# Altium PCB led-controller2.PcbDoc
Units mm, origin at the board's own origin, x right, y up, seen from the top; angles counter-clockwise.
Board outline 33.7 x 32.2 mm, 2 copper layers (Top Layer, Bottom Layer), stack 1.569 mm thick; 53 components, 43 nets, 229 pads, 99 vias.
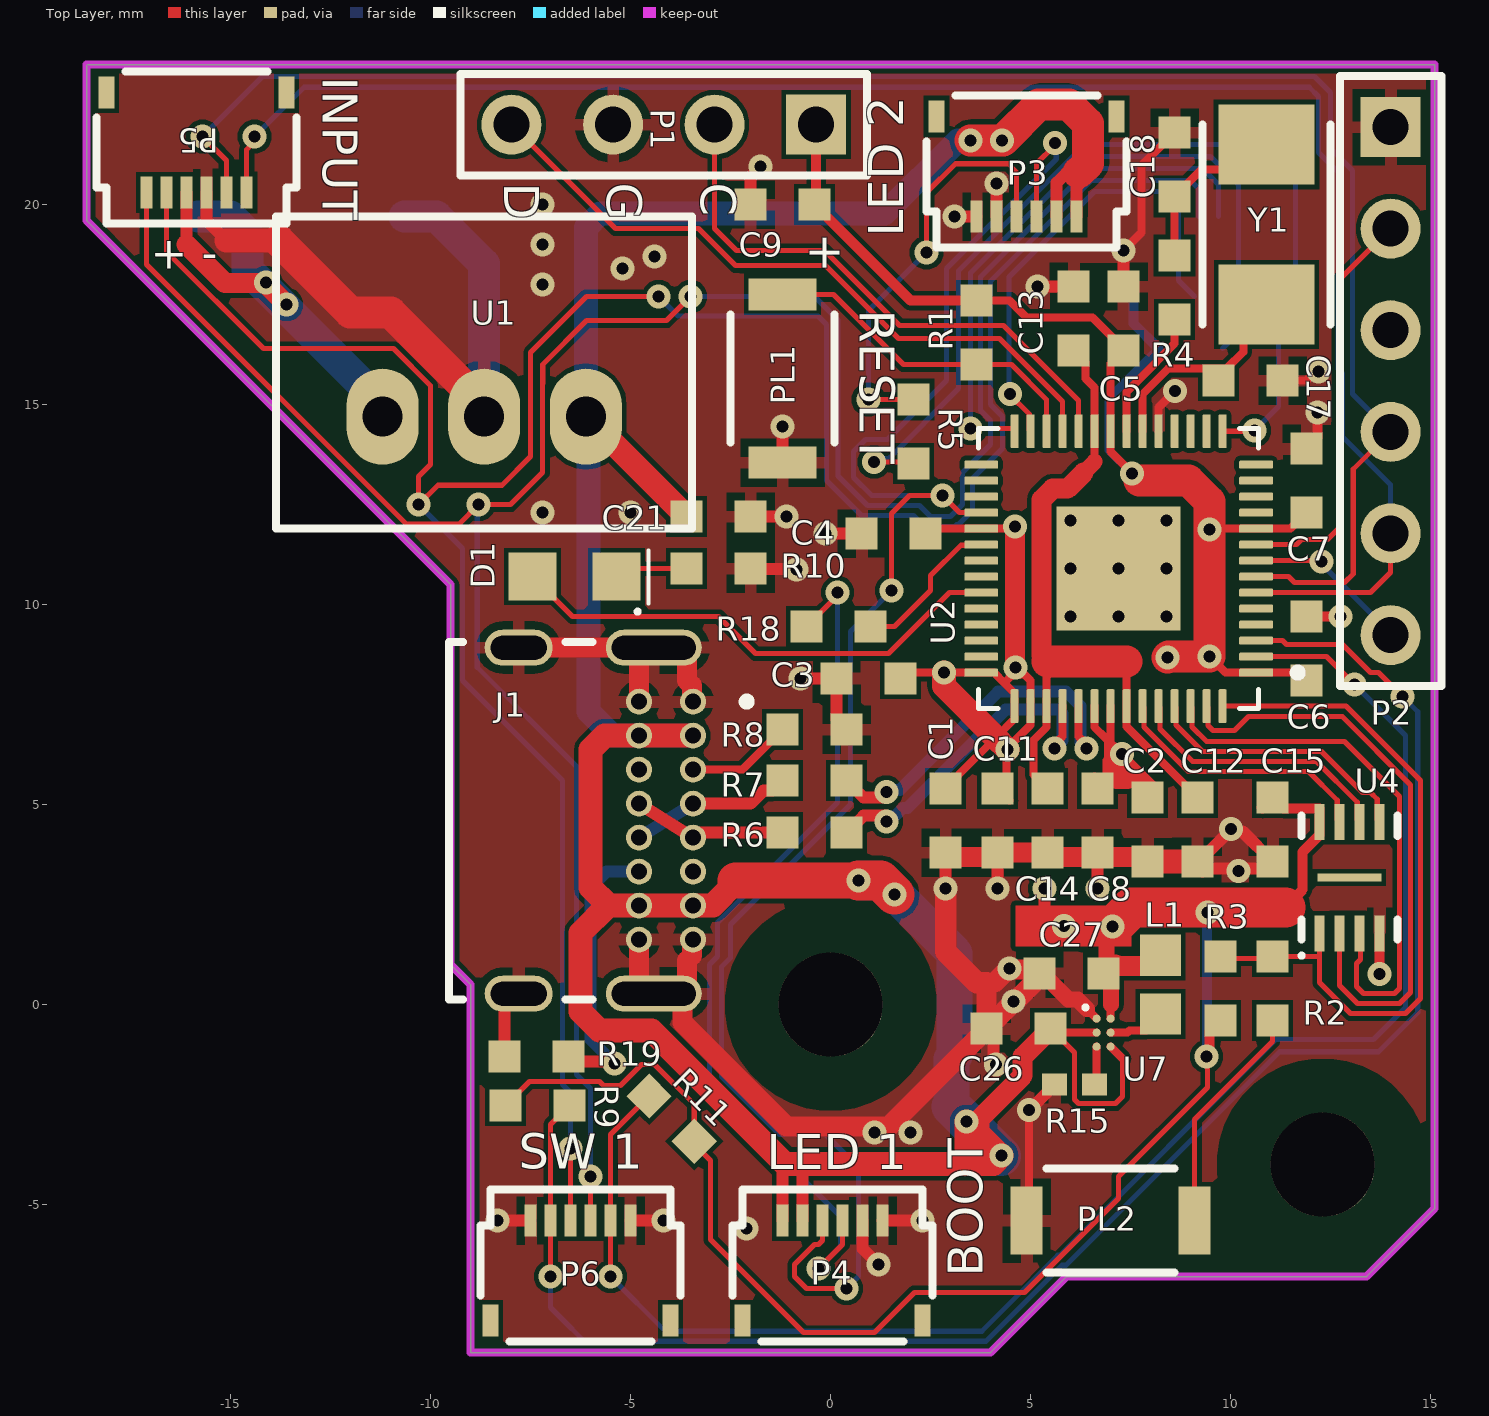
[diagram p0: Top Layer view]
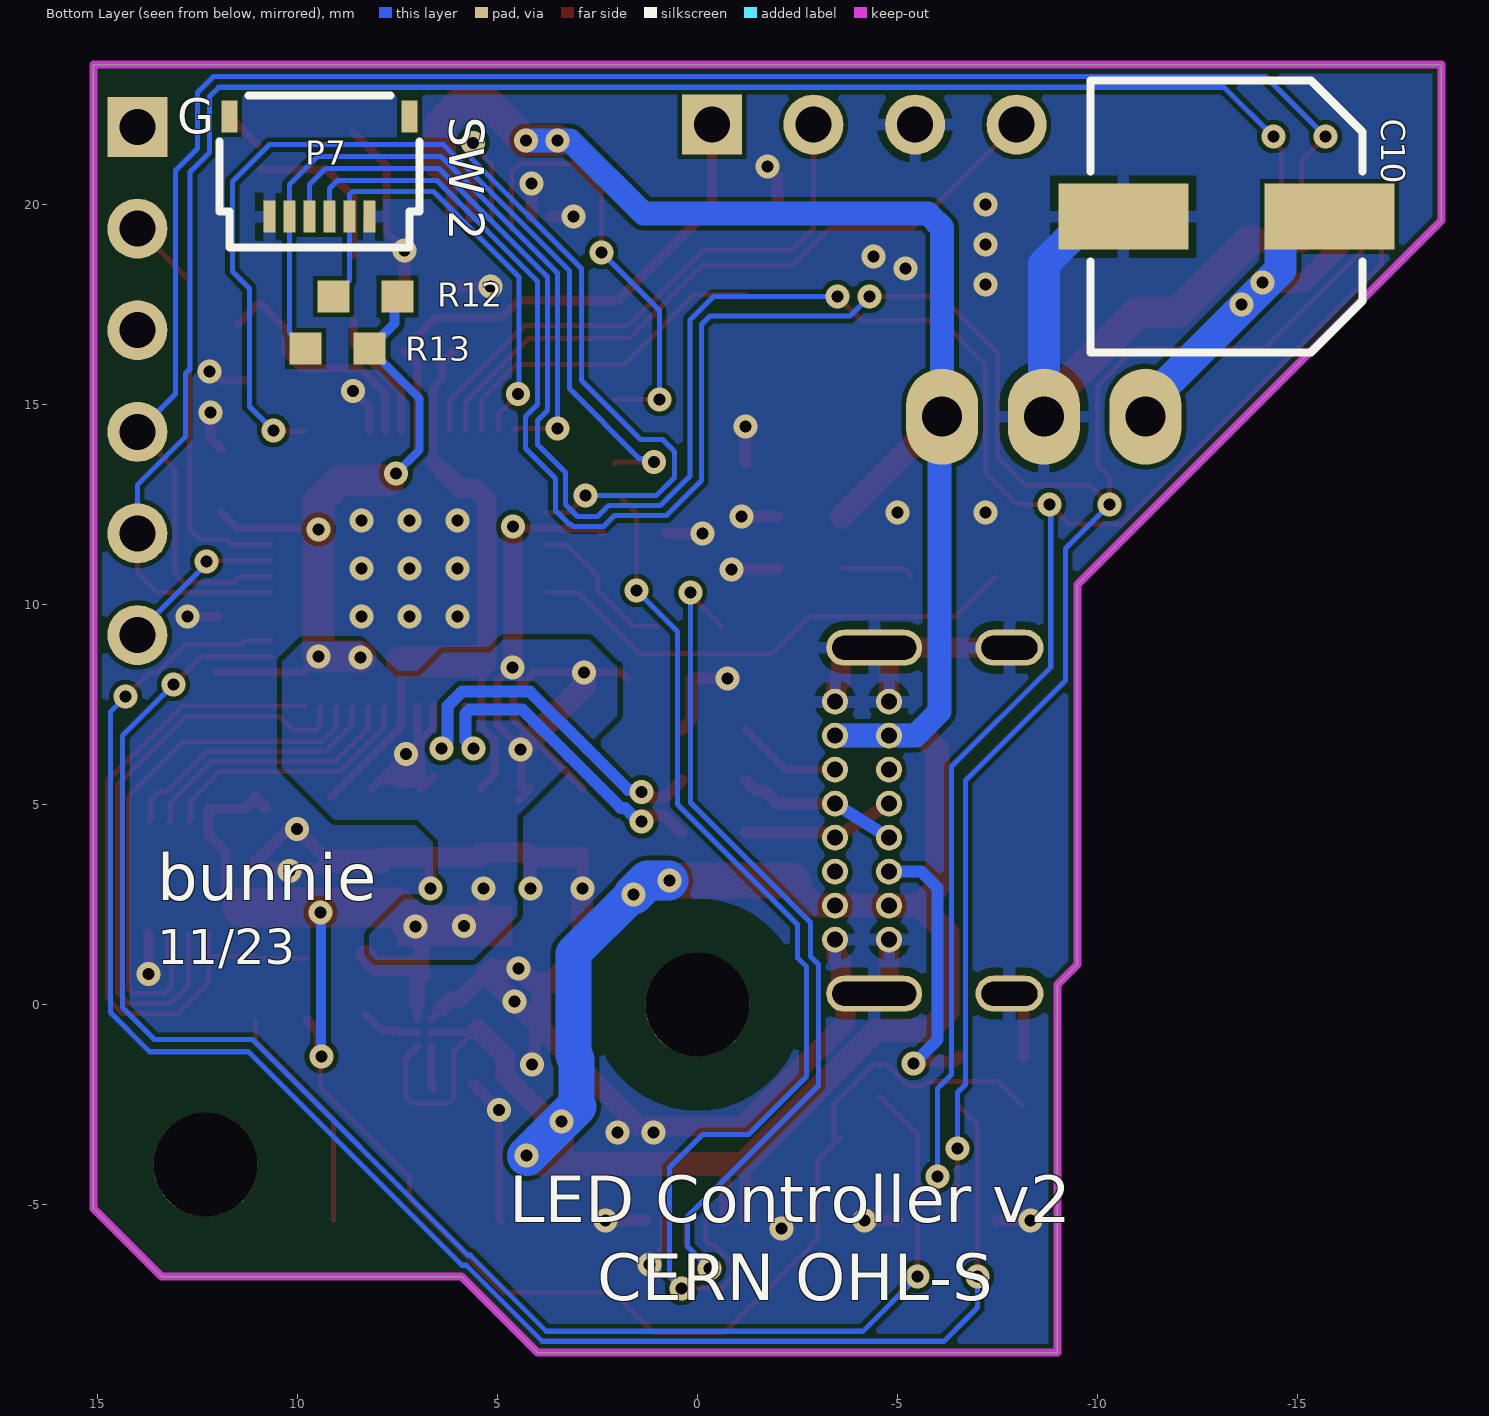
[diagram p1: Bottom Layer view, seen from below]

## Layer stack, top to bottom
Top Solder: solder mask 0.0254, SM-001, Dk 4
Top Layer: signal copper 0.035
Dielectric 1: core 1.4986, Core-043, Dk 4.3
Bottom Layer: signal copper 0.035
Bottom Solder: solder mask 0.0254, SM-001, Dk 4

## Board outline
-9.5,1 -9.5,10.5 -18.6,19.6 -18.6,23.5 15.1,23.5 15.1,-5.1 13.4,-6.8 5.9,-6.8 4,-8.7 -9,-8.7 -9,0.5

## Design rules (kind name [scope] priority, off if disabled: settings)
Clearance [All vs IsPad and not PadIsPlated] p1: gap=1.35 ignorepadtopadclearanceinfootprint=FALSE except(0: Arc-Hole Track-Hole SMDPad-Hole THPad-Hole Via-Hole Fill-Hole Poly-Hole Region-Hole Text-Hole)
Clearance Clearance_1 [All] p2: gap=0.12 ignorepadtopadclearanceinfootprint=FALSE except(0: Arc-Hole Track-Hole SMDPad-Hole THPad-Hole Via-Hole Fill-Hole Poly-Hole Region-Hole Text-Hole)
ComponentClearance [All] p1 off: gap=0.254 collisioncheckmode=3 verticalgap=0.254 showdistances=FALSE
DiffPairsRouting [All] p1: maxlimit=0.3 minlimit=0.15 mostfreqgap=0.15 toplayer_minwidth=0.15 toplayer_maxwidth=0.8 toplayer_prefwidth=0.8 bottomlayer_minwidth=0.15 bottomlayer_maxwidth=0.8 bottomlayer_prefwidth=0.8 maxuncoupledlength=12.7
HoleSize [All] p1: absolutevalues=TRUE maxlimit=2.7 minlimit=0.025 maxpercent=80.000 minpercent=20.000
MinimumSolderMaskSliver [All] p1 off: minsoldermaskwidth=0.254
PolygonConnect [All] p1: thpad.connectstyle=Relief thpad.reliefconductorwidth=0.3 thpad.reliefentries=4 thpad.polygonreliefangle="90 Angle" thpad.airgapwidth=0.2 smdpad.connectstyle=Relief smdpad.reliefconductorwidth=0.3 smdpad.reliefentries=4 smdpad.polygonreliefangle="90 Angle" smdpad.airgapwidth=0.2 via.connectstyle=Direct via.reliefconductorwidth=0.254 via.reliefentries=4 via.polygonreliefangle="90 Angle" via.airgapwidth=0.254
RoutingVias [All] p1: holewidth=0.3 width=0.6 viastyle="Through Hole" minholewidth=0.3 minwidth=0.6 maxholewidth=0.3 maxwidth=0.6
SilkToSilkClearance [All] p1 off: silktosilkclearance=0.254
SilkToSolderMaskClearance [IsPad] p1 off: minsilkscreentomaskgap=0.254 clearancetoexposedcopper=TRUE
SolderMaskExpansion [All] p1: expansion=0.07 istentingtop=FALSE
Width [All] p1: maxlimit=5 minlimit=0.13 preferedwidth=0.15
24 further rules are at their usual default settings.

## Classes and differential pairs
differential pair USB: +USB_P -USB_N
differential pair RPUSB: +RPUSB_P -RPUSB_N

## Components (designator, comment, footprint, x,y, rotation, side; value= is the part's Value field where it differs from the comment)
C1 "0.1uF, 25V, X7R" B_CAP0603 2.875,4.6 r270 top
C2 "0.1uF, 25V, X7R" B_CAP0603 7.925,4.375 r270 top
C3 "0.1uF, 25V, X7R" B_CAP0603 0.95,8.15 r180 top
C4 "0.1uF, 25V, X7R" B_CAP0603 1.575,11.775 r180 top
C5 "0.1uF, 25V, X7R" B_CAP0603 7.325,17.15 r90 top
C6 "0.1uF, 25V, X7R" B_CAP0603 11.9,8.9 r90 top
C7 "2.2uF, 16V, X5R" B_CAP0603 11.9,13.1 r90 top
C8 "2.2uF, 16V, X5R" B_CAP0603 6.675,4.6 r270 top
C9 "0.1uF, 25V, X7R" B_CAP0603 -1.2,20 r180 top
C10 "22uF, 50V" CAPAE7066X61N -13.225,19.7 r0 bottom
C11 "2.2uF, 16V, X5R" B_CAP0603 4.175,4.6 r270 top
C12 "0.1uF, 25V, X7R" B_CAP0603 9.175,4.375 r270 top
C13 "0.1uF, 25V, X7R" B_CAP0603 6.075,17.15 r90 top
C14 "2.2uF, 16V, X5R" B_CAP0603 5.425,4.6 r270 top
C15 "0.1uF, 25V, X7R" B_CAP0603 11.05,4.375 r90 top
C17 "15pF, 50V, NP0" B_CAP0603 10.5,15.6 r180 top
C18 "15pF, 50V, NP0" B_CAP0603 8.6,21 r270 top
C21 "10uF, 6.3V, X5R" B_CAP0603 -2.8,12.2 r0 top
C26 "10uF, 6.3V, X5R" B_CAP0603 4.7,-0.6 r180 top
C27 "10uF, 6.3V, X5R" B_CAP0603 6.025,0.775 r180 top
D1 "white LED" B_LED0805 -6.4,10.7 r180 top
J1 "USB4085-GF-A_REVB" GCT_USB4085-GF-A_REVB -7.8,4.6 r270 top
L1 "0.47uH 0603" B_IND0603 8.25,0.5 r90 top
P1 "Header 4" HDR1X4 -0.36,22 r180 top
P2 "Male 2.54mm 6x1 header" HDR1X6 14,21.94 r270 top
P3 "FH34SRJ-6S-0.5SH(50)" HRS_FH34SRJ-6S-0.5SH(50) 4.9,19.7 r180 top
P4 "FH34SRJ-6S-0.5SH(50)" HRS_FH34SRJ-6S-0.5SH(50) 0.05,-5.4 r0 top
P5 "FH34SRJ-6S-0.5SH(50)" HRS_FH34SRJ-6S-0.5SH(50) -15.85,20.3 r180 top
P6 "FH34SRJ-6S-0.5SH(50)" HRS_FH34SRJ-6S-0.5SH(50) -6.25,-5.4 r0 top
P7 "FH34SRJ-6S-0.5SH(50)" HRS_FH34SRJ-6S-0.5SH(50) 9.45,19.7 r0 bottom
PL1 "Mini Tact" OMRON_B3U-1000P -1.2,15.65 r270 top
PL2 "Mini Tact" OMRON_B3U-1000P 7,-5.4 r180 top
R1 "10k, 1%" B_RES0603 3.65,16.8 r270 top
R2 "1k, 1%" B_RES0603 11.05,0.4 r270 top
R3 "10k, 1%" B_RES0603 9.75,0.4 r270 top
R4 "1k, 1%" B_RES0603 8.6,17.925 r90 top
R5 "27, 1%" B_RES0603 2.075,14.325 r90 top
R6 "27, 1%" B_RES0603 -0.4,4.3 r0 top
R7 "27, 1%" B_RES0603 -0.4,5.6 r0 top
R8 "5.1k, 1%" B_RES0603 -0.4,6.875 r180 top
R9 "10k, 1%" B_RES0603 -7.325,-2.525 r0 top
R10 "51, 1%" B_RES0603 -2.8,10.9 r180 top
R11 "10k, 1%" B_RES0603 -3.975,-2.85 r135 top
R12 "10k, 1%" B_RES0603 8.3,17.7 r0 bottom
R13 "10k, 1%" B_RES0603 9,16.4 r0 bottom
R15 "249k, 1%, +/-200ppm" B_RES0402 6.1,-2 r180 top
R18 "27, 1%" B_RES0603 0.2,9.45 r180 top
R19 "5.1k, 1%" B_RES0603 -7.35,-1.3 r0 top
U1 "OKI-78SR-5/1.5-W36-C" MURATA_OKI-78SR -8.66,14.7 r0 top
U2 "RP2040" QFN40P700X700X90-57N 7.2,10.9 r180 top
U4 "W25Q16JVUXIQ" USON-8 12.975,3.175 r90 top
U7 "TPS62802" BGA6C35P2X3_70X105X40_NSMD 6.825,-0.7 r0 top
Y1 "12.0000 MHz 12pF" NDK_NX5032A 10.9,17.5 r90 top

## Footprints (in the part's own frame and the unit in brackets; to place one, negate y for a bottom-side part, rotate by r counter-clockwise, add the part's x,y. Pads: shape width x height; smd on the part's side, far side on the other; paste and mask are expansions set on the pad)
B_CAP0603 [mm] "Capacitor 0603"
  rect 0.8x0.8 smd mask+0.07: 1(-0.8,0) 2(0.8,0)
  body extent -0.85,-0.45 0.85,0.45, height 0.9
B_IND0603 [mm] "Inductor 0603"
  rect 1.03x1.02 smd: 1(-0.735,0) 2(0.735,0)
  body extent -0.9,-0.5 0.9,0.5, height 0.8
B_LED0805 [mm] "Molded Diode, 2-Leads, Body 2.00x1.25mm, IPC Medium Density"
  rect 1.2x1.2 smd mask+0.07: 1(1.05,0) 2(-1.05,0)
  silkscreen extent -1.85,-0.65 -1.53,0.92, body extent -1,-0.62 1,0.63, height 0.8
B_RES0402 [mm] "Resistor 0402"
  rect 0.63x0.55 smd mask+0.07: 1(-0.5,0) 2(0.5,0)
  body extent -0.53,-0.27 0.53,0.28, height 0.4
B_RES0603 [mm] "Resistor 0603"
  rect 0.8x0.8 smd mask+0.07: 1(-0.8,0) 2(0.8,0)
  body extent -0.85,-0.45 0.85,0.45, height 0.9
BGA6C35P2X3_70X105X40_NSMD [mm] "BGA, 6-Leads, Body 0.70x1.05mmx0.40mm, Pitch 0.35mm"
  round 0.2 smd mask+0.032: A1(-0.175,0.35) A2(0.175,0.35) B1(-0.175,0) B2(0.175,0) C1(-0.175,-0.35) C2(0.175,-0.35)
  silkscreen extent -0.5,0.58 -0.41,0.68, body extent -0.35,-0.53 0.35,0.53, height 0.4
CAPAE7066X61N [mm] "Aluminum Electrolytic Capacitor, Body 6.3mm dia, 5.8mm height, IPC Medium Density"
  rect 3.25x1.65 smd: 1(-2.575,0) 2(2.575,0)
  silkscreen extent -3.4,-3.4 3.4,3.4, body extent -3.4,-3.4 3.4,3.4, height 6.1
GCT_USB4085-GF-A_REVB [mm]
  round 0.65 hole 0.4: A1(-2.975,4.36) A4(-2.125,4.36) A5(-1.275,4.36) A6(-0.425,4.36) A7(0.425,4.36) A8(1.275,4.36) A9(2.125,4.36) A12(2.975,4.36) B1(2.975,3.01) B4(2.125,3.01) B5(1.275,3.01) B6(0.425,3.01) B7(-0.425,3.01) B8(-1.275,3.01) B9(-2.125,3.01) B12(-2.975,3.01)
  oval 0.9x1.7 hole 0.6 slot 1.4 at 90 deg: S1(-4.325,0) S2(4.325,0)
  oval 0.9x2.4 hole 0.6 slot 2.1 at 90 deg: S3(-4.325,3.38) S4(4.325,3.38)
  silkscreen extent -4.47,-1.74 4.47,5.8, body extent -4.47,-4.25 4.47,4.92, height 3.46
HDR1X4 [mm]
  rect 1.5x1.5 hole 0.9: 1(0,0)
  round 1.5 hole 0.9: 2(2.54,0) 3(5.08,0) 4(7.62,0)
  silkscreen extent -1.27,-1.27 8.89,1.27
HDR1X6 [mm]
  rect 1.5x1.5 hole 0.9: 1(0,0)
  round 1.5 hole 0.9: 2(2.54,0) 3(5.08,0) 4(7.62,0) 5(10.16,0) 6(12.7,0)
  silkscreen extent -1.27,-1.27 13.97,1.27
HRS_FH34SRJ-6S-0.5SH(50) [mm] "Top/bottom entry, back-lock 0.3mm thick FPC, 6 pins"
  rect 0.4x0.8 smd mask+0.07: 0(-2.25,-2.5) 0(2.25,-2.5)
  rect 0.3x0.8 smd mask+0.07: 1(1.25,0) 2(0.75,0) 3(0.25,0) 4(-0.25,0) 5(-0.75,0) 6(-1.25,0)
  silkscreen extent -2.5,-3.03 2.5,0.77, body extent -2.5,-3.02 2.5,0.78, height 1
MURATA_OKI-78SR [mm] "OKI-78SR LDO replacement"
  oval 1.8x2.4 hole 1 mask+0.07: 1(-2.54,0) 2(0,0) 3(2.54,0)
  silkscreen extent -5.2,-2.8 5.2,5, body extent -5.21,-2.8 5.21,4.93, height 16.58
NDK_NX5032A [mm] "5x3.2mm crystal, SMT"
  rect 2x2.4 smd: 1(0,0) 2(4,0)
  silkscreen extent -0.5,-1.6 4.5,1.6
OMRON_B3U-1000P [mm] "Ultra-Small Tactile Switch (SMT)"
  rect 0.8x1.7 smd mask+0.07: 1(-2.1,0) 2(2.1,0)
  silkscreen extent -1.6,-1.3 1.6,1.3, body extent -2,-1.25 2,1.25, height 1.75
QFN40P700X700X90-57N [mm]
  rrect25% 0.84x0.2 smd: 1(-3.435,2.6) 2(-3.435,2.2) 3(-3.435,1.8) 4(-3.435,1.4) 5(-3.435,1) 6(-3.435,0.6) 7(-3.435,0.2) 8(-3.435,-0.2) 9(-3.435,-0.6) 10(-3.435,-1) 11(-3.435,-1.4) 12(-3.435,-1.8) 13(-3.435,-2.2) 14(-3.435,-2.6) 29(3.435,-2.6) 30(3.435,-2.2) 31(3.435,-1.8) 32(3.435,-1.4) 33(3.435,-1) 34(3.435,-0.6) 35(3.435,-0.2) 36(3.435,0.2) 37(3.435,0.6) 38(3.435,1) 39(3.435,1.4) 40(3.435,1.8) 41(3.435,2.2) 42(3.435,2.6)
  rrect25% 0.2x0.84 smd: 15(-2.6,-3.435) 16(-2.2,-3.435) 17(-1.8,-3.435) 18(-1.4,-3.435) 19(-1,-3.435) 20(-0.6,-3.435) 21(-0.2,-3.435) 22(0.2,-3.435) 23(0.6,-3.435) 24(1,-3.435) 25(1.4,-3.435) 26(1.8,-3.435) 27(2.2,-3.435) 28(2.6,-3.435) 43(2.6,3.435) 44(2.2,3.435) 45(1.8,3.435) 46(1.4,3.435) 47(1,3.435) 48(0.6,3.435) 49(0.2,3.435) 50(-0.2,3.435) 51(-0.6,3.435) 52(-1,3.435) 53(-1.4,3.435) 54(-1.8,3.435) 55(-2.2,3.435) 56(-2.6,3.435)
  rect 3.1x3.1 smd paste-0.57: 57(0,0)
  silkscreen extent -4.57,-3.5 3.5,3.5, body extent -3.5,-3.5 3.5,3.5, height 0.9
USON-8 [mm] "SON, 8-Leads, Body 2.00x3.00mm, Pitch 0.50mm, Thermal Pad 1.60x0.20mm, IPC Medium Density"
  rect 0.9x0.25 smd mask+0.07: 1(-1.395,0.75) 2(-1.395,0.25) 3(-1.395,-0.25) 4(-1.395,-0.75) 5(1.395,-0.75) 6(1.395,-0.25) 7(1.395,0.25) 8(1.395,0.75)
  rect 0.2x1.6 smd mask+0.07: 9(0,0)
  silkscreen extent -2,-1.2 1.55,1.25, body extent -1.55,-1.05 1.55,1.05, height 0.6

## Part data
C1 C2 C3 C4 C5 C6 C9 C12 C13 C15: library part "Cap Semi", "Capacitor (Semiconductor SIM Model)", MPN=CC0603KRX7R8BB104, MYPN=C-104-25-X7R-0603, VENDOR=Murata
C7 C8 C11 C14: library part "Cap Semi", "Capacitor (Semiconductor SIM Model)", MPN=CL10A225KO8NNNC, MYPN=C-225-16-X5R-0603, VENDOR=Samsung
C10: library part "Cap Pol1", "Polarized Capacitor (Radial)", MPN=EEH-ZA1H220P, MYPN=C-226-50-UCL-6.3x8.0, VENDOR=Panasonic
C17 C18: library part "Cap Semi", "Capacitor (Semiconductor SIM Model)", MPN=CL10C150JB81PNC, MYPN=C-150-50-NP0-0603, VENDOR=Samsung
C21 C26 C27: library part "Cap Semi", "Capacitor (Semiconductor SIM Model)", MPN=CL10A106MQ8NNNC, MYPN=C-106-6.3-X5R-0603, VENDOR=Samsung
D1: library part LED2, "Typical RED, GREEN, YELLOW, AMBER GaAs LED", MPN=EAST2012WA1, MYPN=D-LED-WHITE1-0805, VENDOR=Everlight
J1: "USB-C (USB TYPE-C) USB 2.0 Receptacle Connector 24 (16+8 Dummy) Position Through Hole, Right Angle, low cost, 3.46mm profile, 16 pin, horizontal, Top mount", MPN=USB4085-GF-A, Package=None, Availability="In Stock", Check_prices=https://www.snapeda.com/parts/USB4085-GF-A/Global+Connector+Technology/view-part/?ref=eda, MF="Global Connector Technology", MP=USB4085-GF-A, Price=None, SnapEDA_Link=https://www.snapeda.com/parts/USB4085-GF-A/Global+Connector+Technology/view-part/?ref=snap, VENDOR=GCT
L1: library part "Inductor Iron", "Magnetic-Core Inductor", MPN=TFM160808ALC-R47MTAA, MYPN=L-TFM160808ALC-R47MTAA, VENDOR=TDK
P1: "Header, 4-Pin", MPN="PH1-04-UA / ANY", LatestRevisionDate=17-Jul-2002, LatestRevisionNote="Re-released for DXP Platform.", Publisher="Altium Limited", VENDOR="Adam Tech / ANY"
P2: library part "Header 6", "Header, 6-Pin", MPN="PH1-06-UA / ANY", LatestRevisionDate=17-Jul-2002, LatestRevisionNote="Re-released for DXP Platform.", Publisher="Altium Limited", VENDOR="Adam Tech / ANY"
P3 P4 P5 P6 P7: library part "Header 6", "Header, 6-Pin", LatestRevisionDate=17-Jul-2002, LatestRevisionNote="Re-released for DXP Platform.", MPN=FH34SRJ-6S-0.5SH(50), MYPN=J-FH34SRJ-6S-0.5SH(50), Publisher="Altium Limited", VENDOR=HRS
PL1 PL2: library part "Header 2", "Header, 2-Pin", MPN=B3U-1000P, LatestRevisionDate=17-Jul-2002, LatestRevisionNote="Re-released for DXP Platform.", MYPN=SW-EVQ-P6DB35, Publisher="Altium Limited", VENDOR=Omron
R1 R3 R9 R11 R12 R13: library part Res1, "Resistor", MPN=RC0603FR-0710KL, MYPN=R-103-1P-1_16W-0603, VENDOR=Yageo
R2 R4 R5 R6 R7 R10 R18: library part Res1, "Resistor", MPN=ANY, VENDOR=ANY
  R2 R4: MYPN=R-102-1P-1_16W-0603
  R5 R6 R7 R18: MYPN=R-270-1P-1_16W-0603
  R10: MYPN=R-510-1P-1_16W-0603
R8 R19: library part Res1, "Resistor", MPN=RC0603FR-075K1L, MYPN=R-512-1P-1_16W-0603, VENDOR=Yageo
R15: library part Res1, "Resistor", MPN=RC0402FR-07249KL, MYPN=R-2493-1P-1_16W-0402, VENDOR=Yageo
U1: library part VR20, "OKI-78SR switching regulator", MFG=Murata, MPN=OKI-78SR-5/1.5-W36-C
U2: "RP2040 chip for Raspberry Pi Pico - ARMÂ® CortexÂ®-M0+ MCU 32-Bit", MPN=SC0914(7/13), Package=None, Availability="In Stock", Check_prices=https://www.snapeda.com/parts/RP2040/Raspberry+Pi/view-part/?ref=eda, MF="Raspberry Pi", MP=RP2040, Price=None, Purchase-URL=https://pricing.snapeda.com/search/part/RP2040/?ref=eda, SnapEDA_Link=https://www.snapeda.com/parts/RP2040/Raspberry+Pi/view-part/?ref=snap, VENDOR="Raspberry Pi"
U4: library part EN25P05-50GCP, "16Mbit SPI NOR FLASH", MPN=W25Q16JVUXIQ, MYPN="UW25Q16JVUXIQ TR", VENDOR=Winbond
U7: "Buck regulator, 4MHz, 0.6A, 1.8V-3.3V, low Iq", MPN=TPS62802YKAR, MYPN=U-TPS62802YKA(T/R), VENDOR=TI
Y1: library part XTAL, "Crystal Oscillator", MPN=ECS-120-12-30-JGN-TR, LatestRevisionDate=17-Jul-2002, LatestRevisionNote="Re-released for DXP Platform.", PackageReference=R38, Published=8-Jun-2000, Publisher="Altium Limited", VENDOR=ECS

## Free pads (board coordinates)
  round 2.6 hole 2.6 unplated mask+1.2: 0(0,0) 0(12.3,-4)

## Via types
v1: diameter 0.6, hole 0.3, Top Layer to Bottom Layer, tented both sides, 90 vias
v2: diameter 0.6, hole 0.3, Top Layer to Bottom Layer, tented top, 9 vias

## Nets (pads, with @x,y where several pads share a name; then routed paths per layer and width w, separated by ;. In a path a pad name is that pad's centre, name@x,y a point inside that pad or via, vN(x,y) a via of type N, cw(c..) or ccw(c..) an arc to the next point about the centre after c; other vN are vias at no path point)
1050_OFF: P3.4 P4.4 U2.32 | length 44.4
  Top Layer w0.13: P4.4 -0.2,-5.9 -0.3,-6 -0.4,-6 -0.9,-6.5 -0.9,-6.8 -0.6,-7.1 v1(0.4,-7.1) ; v1@1.55,10.325 v1(1.525,10.35) 1.525,12.275 1.975,12.725 v1(2.8,12.725) 3.225,12.3 U2.32 ; P3.4 5.15,21.025 5.611,21.486 v1(5.611,21.547)
  Bottom Layer w0.13: v1(0.4,-7.1) 0.7,-6.8 0.7,-4.075 -0.125,-3.25 -1.275,-3.25 -2.725,-1.8 -2.725,0.946 -2.5,1.171 -2.5,2 0.5,5 0.5,9.325 v1(1.525,10.35) ; v1(2.8,12.725) 1.029,12.725 0.575,13.179 0.575,13.825 0.875,14.125 1.425,14.125 2.9,15.6 2.9,18.4 5.642,21.142 5.642,21.515 v1(5.611,21.547)
D_PWM: R18.1 U2.34 | length 3.8
  Top Layer w0.13: R18.1 1.6,9.45 2.5,10.35 2.5,10.725 3.259,11.484 3.749,11.484 U2.34
D_PWM2: R5.1 U2.15 | length 24.4
  Top Layer w0.13: v1(1.087,13.563) 2.037,13.563 R5.1 ; U2.15 10.585,14.335 v1(10.6,14.35)
  Bottom Layer w0.13: v1(1.087,13.563) 1.17,13.645 1.445,13.645 3.2,15.4 3.2,18.346 6.354,21.5 10.7,21.5 11.625,20.575 11.625,18.325 11.2,17.9 11.2,14.95 v1(10.6,14.35)
ESTOP1: P5.1 P6.3 P7.3 | length 66.7
  Top Layer w0.13: P5.1 -17.1,18.503 -10.612,12.015 -9.285,12.015 v1(-8.8,12.5) -8,12.5 -7.2,13.3 -7.2,14.296 cw(c-6.12,14.4) -7.205,14.4 -7.205,15 cw(c-6.12,15) -7.205,15.009 -7.197,16.003 -6.1,17.1 -4.1,17.1 v1(-3.5,17.7) ; P6.3 v1(-6,-4.3)
  Bottom Layer w0.13: v1(-8.8,12.5) -8.835,12.465 -8.835,8.435 -6.35,5.95 -6.35,-1.75 -6,-2.1 v1(-6,-4.3) ; v1(-3.5,17.7) -0.4,17.7 0.183,17.117 0.183,13.217 0.925,12.475 2.225,12.475 2.5,12.2 3,12.2 3.3,12.5 3.3,13.3 4,14 4,14.6 3.75,14.85 3.75,18.189 6.461,20.9 9.3,20.9 9.7,20.5 P7.3
ESTOP2: P5.2 P6.4 P7.4 | length 67.6
  Top Layer w0.13: P5.2 -16.6,18.82 -14.18,16.4 -10.927,16.4 -10,15.473 -10,13.5 -10.3,13.2 v1(-10.3,12.5) -9.815,12.985 -8.215,12.985 -7.5,13.7 -7.5,16.3 -6.1,17.7 v1(-4.3,17.7) ; P6.4 v1(-6.5,-3.6)
  Bottom Layer w0.13: v1(-10.3,12.5) -9.2,11.4 -9.2,8.1 -6.7,5.6 -6.7,-2 -6.5,-2.2 v1(-6.5,-3.6) ; v1(-4.3,17.7) -3.815,17.215 -0.315,17.215 -0.1,17 -0.1,13.1 0.775,12.225 2.075,12.225 2.3,12 2.35,11.95 3.104,11.95 3.154,12 3.2,12 3.55,12.35 3.55,13.15 4.3,13.9 4.3,14.7 4,15 4,18.086 6.514,20.6 9,20.6 9.2,20.4 P7.4
GND: C1.2 C2.2 C3.2 C4.2 C5.2 C6.2 C7.2 C8.2 C9.2 C10.2 C11.2 C12.2 C13.2 C14.2 C15.1 C17.1 C18.1 C21.2 C26.2 C27.2 J1.A1 J1.A12 J1.B1 J1.B12 J1.S1 J1.S2 J1.S3 J1.S4 P1.3 P2.1 P3.1 P3.2 P4.1 P4.2 P5.4 P6.1 P6.6 P7.1 P7.6 PL1.2 PL2.2 R8.1 R10.1 R15.2 R19.1 U1.2 U2.19 U2.57 U4.4 U7.A1 | length 88.6
  Top Layer w0.2: PL2.2 4.964,-5.336 v1(4.964,-2.636) ; 6.412,-0.113 U7.A1 ; v1(7.325,18.85) 7.775,19.3 7.775,20.975 C18.1 ; U2.19 8.2,14.926 v1(8.612,15.338) ; C17.1 11.898,15.6 12.123,15.825 v1(12.2,15.825)
  Top Layer w0.25: C7.2 12.175,14.175 v1(12.175,14.8) ; C6.2@12,9.7 v1(12.75,9.7) ; v1(13.725,0.76) U4.4
  Top Layer w0.3: P5.4 -15.6,19.6 -15.1,19.1 ; v1(-8.325,-5.4) P6.6 ; R19.1 -8.15,-0.002 -7.873,0.275 J1.S2 ; P6.1 v1(-4.175,-5.4) ; R10.1 -1.987,10.888 -0.862,10.888 v1(-0.85,10.875) v1@-0.825,10.9 ; C21.2 v1(-1.1,12.2) ; C9.2 -2,20.7 v1(-1.75,20.95) ; PL1.2 v1(-1.2,14.45) ; v1(-0.75,8.15) C3.2 0.15,7.125 R8.1 ; v1(-0.125,11.775) C4.2 ; P4.2 0.8,-6.1 v1(1.2,-6.5) ; P4.1 v1(2.3,-5.4) ; v1(2.875,2.9) C1.2 C1.2@2.988,3.688 ; v1(3.1,19.7) P3.1 ; C26.2 4.073,-0.773 4.073,-1.44 v1(4.13,-1.497) ; v1@4.1,20.5 4.15,20.45 P3.2 ; v1(4.175,2.9) C11.2@4.175,3.688 ; v1(4.575,0.075) v1@4.6,0.075 ; v1(4.964,-2.636) R15.2 ; C27.2@5.153,0.922 C27.2@5.3,0.775 ; v1(5.175,17.95) C13.2 ; v1(6.675,2.9) C8.2@6.675,3.688 ; C5.2 v1(7.325,18.85) ; C12.2@9.3,3.325 9.377,3.402 10.143,3.402 v1(10.2,3.345) 10.257,3.402 10.877,3.402 C15.1 10.296,4.329 10.069,4.329 v1(10.011,4.386) C12.2@9.375,3.75
  Top Layer w0.4: C27.2@5.3,0.775 5.95,0.125 6.175,0.125 6.412,-0.113
  Top Layer w0.5: J1.S1 J1.S3 -3.778,8.925 -3.593,8.74 -3.593,8.098 -3.469,7.974 -3.469,7.604 J1.A1 ; J1.B1 -4.79,0.275 J1.S4 -3.778,0.275 -3.593,0.46 -3.593,1.102 -3.469,1.226 -3.469,1.596 J1.A12 ; J1.B12 J1.S3@-4.79,8.74 ; J1.S4@-3.724,0.09 -3.699,0.09 -3.699,-0.451 -1.1,-3.05 1.45,-3.05 C26.2 ; C1.2@2.988,3.688 4.175,3.688 4.288,3.8 C14.2 ; v1(4.575,0.075) C26.2 ; v1@4.6,0.075 C27.2@5.3,0.775 ; C27.2@5.153,0.922 5.111,0.881 4.494,0.881 v1(4.475,0.9) 4.448,0.9 4.098,0.55 3.9,0.55 C26.2 ; C14.2@5.425,3.688 6.675,3.688 C2.2@7.925,3.688
  Top Layer w0.54: v1(2.875,2.9) 2.875,1.325 3.65,0.55 3.9,0.55
  Top Layer w0.6: -15.1,19.1 -13.8,19.1 ; C2.2 C12.2
  Top Layer w0.8: -13.8,19.1 -12,17.3 -11,17.3 -8.66,14.96 U1.2
  Bottom Layer w0.8: C10.2 -9.85,19.7 -8.66,18.51 U1.2
  other v1: -2.1,-5.6 1.1,-3.2 2,-3.2 -7.2,12.3 -5,12.3 -7.2,18 -5.2,18.4 -4.4,18.7 -7.2,19 -7.2,20 4.15,20.532
  other v2: 6,9.7 7.2,9.7 8.4,9.7 6,10.9 7.2,10.9 8.4,10.9 6,12.1 7.2,12.1 8.4,12.1
LIMIT_A0: P6.2 R11.2 U2.2 | length 40.1
  Top Layer w0.13: v1(-5.5,-6.8) P6.2 -5.5,-3.244 R11.2 ; U2.2 12.4,8.7 v1(13.1,8)
  Bottom Layer w0.13: v1(-5.5,-6.8) -4.135,-8.165 3.778,-8.165 5.678,-6.265 5.735,-6.265 11.125,-0.875 13.575,-0.875 14.375,-0.075 14.375,6.725 v1(13.1,8)
LIMIT_A1: P6.5 R9.2 U2.3 | length 43
  Top Layer w0.13: v1(-7,-6.8) P6.5 -7,-3 R9.2 ; U2.3 11.3,9.1 11.4,9 12.8,9 13.5,8.3 13.7,8.3 v1(14.3,7.7)
  Bottom Layer w0.13: v1(-7,-6.8) -7,-7.575 -6.737,-7.838 -6.16,-8.415 3.882,-8.415 5.782,-6.515 5.885,-6.515 11.224,-1.176 13.699,-1.176 14.676,-0.199 14.676,7.324 v1(14.3,7.7)
LIMIT_B0: P7.2 R13.2 U2.28 | length 17.5
  Top Layer w0.13: v1(3.5,14.4) 4.565,14.4 4.6,14.365 U2.28
  Bottom Layer w0.13: v1(3.5,14.4) 3.5,18.293 6.407,21.2 9.5,21.2 10.2,20.5 P7.2 10.2,16.8 R13.2
LIMIT_B1: P7.5 R12.2 U2.27 | length 12
  Top Layer w0.13: v1(4.485,15.27) 4.485,15.244 4.965,14.764 4.965,14.37 U2.27
  Bottom Layer w0.13: v1(4.485,15.27) 4.459,15.296 4.459,18.191 6.596,20.328 8.622,20.328 8.7,20.25 P7.5 8.7,18.1 R12.2
NetC17_2: C17.2 U2.20 Y1.1 | length 6
  Top Layer w0.2: U2.20 7.8,15.261 8.439,15.9 9.9,15.9 10.317,16.317 10.317,16.917 Y1.1 ; Y1.1@11,17.5 Y1.1@11.5,17
NetC18_2: C18.2 R4.2 Y1.2 | length 4.9
  Top Layer w0.2: R4.2 C18.2 9.275,20.875 Y1.2@10.925,20.875 ; Y1.2@11,21.5 Y1.2@11.575,22.075
NetD1_1: D1.1 U2.37 | length 12.6
  Top Layer w0.13: D1.1 -6.45,9.7 -2.8,9.7 -1.875,8.775 1.45,8.775 2.975,10.3 U2.37
NetD1_2: D1.2 R10.2 | length 1.8
  Top Layer w0.13: D1.2 -5.15,10.9 R10.2
NetJ1_A5: J1.A5 R8.2 | length 2.7
  Top Layer w0.2: J1.A5 -2.2,5.875 R8.2
NetJ1_B5: J1.B5 R19.2 | length 7.3
  Top Layer w0.3: R19.2 -6.432,-1.418 -5.457,-1.418 v1(-5.4,-1.475) v1@-5.457,-1.532
  Bottom Layer w0.3: v1(-5.4,-1.475) -6,-0.875 -6,2.925 -5.6,3.325 J1.B5
NetPL2_1: PL2.1 R2.2 | length 5.8
  Top Layer w0.13: PL2.1 9.1,-2.875 11.05,-0.925 R2.2
NetR4_1: R4.1 U2.21 | length 3.3
  Top Layer w0.2: U2.21 7.4,15.314 8.15,16.064 8.15,16.075 8.6,16.525 R4.1
NetR15_1: R15.1 U7.C1 | length 1.1
  Top Layer w0.2: R15.1@6.6,-2.1 6.65,-2.05 U7.C1
P1.1V: C12.1 C13.1 C14.1 U2.23 U2.45 U2.50 | length 18.5
  Top Layer w0.2: C14.1 5.075,5.75 5.075,6.61 5.4,6.935 U2.45 5.4,8.2 5.6,8.4 ; C13.1 6.375,16.05 6.375,15.65 6.6,15.425 U2.23 6.6,13.575 ; 7.4,8.575 U2.50 7.4,6.95 C12.1
  Top Layer w0.4: 5.275,8.725 5.6,8.4 ; 6.325,13.3 6.6,13.575
  Top Layer w0.5: 5.275,8.725 5.275,12.625 5.55,12.9 5.925,12.9 6.325,13.3
  Top Layer w0.8: 5.425,8.575 7.4,8.575
P3.3V: C1.1 C2.1 C3.1 C4.1 C5.1 C6.1 C7.1 C8.1 C9.1 C11.1 C15.2 C27.1 L1.2 P1.1 R1.1 R3.2 R9.1 R11.1 R12.1 R13.1 U2.1 U2.10 U2.22 U2.33 U2.42 U2.43 U2.44 U2.48 U2.49 U4.8 U7.A2 | length 109.5
  Top Layer w0.13: R9.1 -7.525,-1.925 -5.775,-1.925 -5.675,-2.025 -5.25,-2.025 -4.725,-1.5 -4.4,-1.5 -3.409,-2.491 R11.1 ; R11.1@-3.6,-3.3 -3,-3.9 ; R11.1@-3.447,-3.453 -3,-3.9 ; v1(9.4,-1.3) 9.425,-1.325 9.425,-2.075 7.2,-4.3 7.2,-4.85 4.85,-7.2 2.1,-7.2 1.1,-8.2 -0.675,-8.2 -3,-5.875 -3,-3.9
  Top Layer w0.2: C3.1 1.9,8.3 v1(2.832,8.3) U2.42 4.085,8.3 4.342,8.043 ; C4.1 2.5,11.9 U2.33 4.555,11.9 v1(4.605,11.95) ; C1.1 3.175,5.7 3.175,5.72 4.127,6.673 ; R1.1 4.475,17.6 4.9,17.175 6.55,17.175 C5.1@7.15,16.575 ; C11.1 C11.1@4.475,5.1 ; C11.1@4.4,5.4 v1@4.4,6.4 ; v1@4.612,8.441 v1@4.625,8.427 ; v1@4.612,11.937 v1@4.625,11.95 ; v1(4.618,8.427) 4.618,8.332 v1@4.7,8.25 ; 4.795,2 4.795,1.962 v1(5.837,1.962) ; 5.35,2 5.35,2.075 ; C8.1@6.6,5.7 C8.1@6.9,5.4 ; U2.48 6.6,6.935 6.868,6.668 ; U7.A2 7,0.01 ; U2.49 7,6.55 ; C5.1 7,16.025 U2.22 7,13.825 v1@7.725,13.1 ; C2.1@8.15,5.4 7.95,5.6 ; v1(9.475,8.7) 9.875,8.3 U2.1 C6.1@12.025,8.3 ; v1(9.475,11.875) 9.5,11.9 U2.10 11.5,11.9 C7.1 ; 4.127,6.673 4.6,7.145 U2.43 4.6,7.785 4.342,8.043 ; 4.127,6.673 v1@4.4,6.4 ; 4.342,8.043 4.55,8.25 v1@4.7,8.25 ; v1@4.4,6.4 v1(4.425,6.375) 4.425,6.413 5,6.988 U2.44 5,8.1 4.85,8.25 v1@4.7,8.25 ; 6.868,6.668 6.937,6.598 6.937,6.137 ; 6.868,6.668 6.882,6.668 7,6.55 ; C8.1@6.9,5.4 6.9,5.85 ; C8.1@6.9,5.4 C8.1@7,5.5 ; 6.9,5.85 6.9,6.1 6.937,6.137 ; 6.9,5.85 7,5.95 ; 6.937,6.137 v1@7,6.2 ; 6.937,6.137 7,6.137 ; C8.1@7,5.5 7.141,5.641 7.2,5.7 7.34,5.7 7.421,5.781 ; C8.1@7,5.5 7,5.95 ; 7,5.95 7,6.137 ; 7,5.95 7.003,5.953 7.388,5.953 ; 7,6.137 v1@7,6.2 ; 7,6.137 v1@7.204,6.137 ; v1@7,6.2 v1@7,6.341 ; v1@7,6.341 v1@7.204,6.137 ; v1@7,6.341 7,6.482 ; 7,6.482 7,6.55 ; 7,6.482 7.068,6.482 ; 7,6.55 7.068,6.482 ; 7.068,6.482 v1(7.288,6.262) 7.509,6.041 ; v1@7.204,6.137 7.388,5.953 ; 7.388,5.953 7.421,5.953 ; 7.388,5.953 7.421,5.921 ; 7.421,5.781 7.421,5.921 ; 7.421,5.781 7.421,5.641 7.7,5.641 ; 7.421,5.921 7.421,5.953 ; 7.421,5.921 7.7,5.641 ; 7.421,5.953 7.509,6.041 ; 7.509,6.041 7.95,5.6 ; 7.7,5.641 7.7,5.6 7.95,5.6
  Top Layer w0.25: P1.1 -0.36,20.04 C9.1 2,17.6 R1.1 ; v1(9.4,-1.3) 9.4,-1.205 9.475,-1.13 9.475,-0.675 R3.2 ; C15.2 11.325,4.9 12.22,4.9 12.225,4.895 U4.8 12.225,4.245 11.8,3.82 11.8,2.875 11.375,2.45
  Top Layer w0.3: 4.795,2 5.35,2 ; 5.35,2.075 v1(5.35,2.9) ; C15.2@10.8,4.925 C15.2
  Top Layer w0.4: v1@6.875,2.125 6.9,2.1 6.9,0.775 7.008,0.667 7.008,0.01
  Top Layer w0.5: v1@4.612,8.441 v1@4.612,11.937 ; C27.1@6.9,0.775 C27.1@7.095,0.97 ; C27.1@7.125,1 C27.1@7.095,0.97 ; 7.141,5.641 7.421,5.641 ; L1.2@8.3,1.235 8.3,1.23 8.04,0.97 C27.1@7.095,0.97
  Top Layer w0.6: v1(2.832,8.3) 2.832,7.968 4.127,6.673 4.4,6.4 v1(4.425,6.375)
  Top Layer w0.8: v1@7.725,13.1 8.95,13.1 9.475,12.575 v1(9.475,11.875) v1(9.475,8.7) 8.45,8.7 v1(8.425,8.675)
  Top Layer w1: v1(7.05,1.95) 7.525,2.425 11.375,2.425
  Bottom Layer w0.2: v1(7.535,13.284) 6.95,13.869 6.95,15.15 R13.1
  Bottom Layer w0.25: R12.1 7.571,17.629 7.571,17.029 R13.1 ; v1(9.4,-1.3) 9.412,-1.288 9.412,2.287 v1(9.425,2.3)
P5.0V: C21.1 C26.1 J1.A4 J1.A9 J1.B4 J1.B9 P3.5 P3.6 P4.5 P4.6 U1.3 U7.B1 U7.C2 | length 90.4
  Top Layer w0.13: C26.1 5.6,-0.7 6.1,-1.2 6.1,-2.375 6.2,-2.475 7.125,-2.475 7.3,-2.3 7.3,-1.35
  Top Layer w0.2: C26.1@5.6,-0.7 U7.B1 ; U7.C2 7.3,-1.35
  Top Layer w0.3: P4.6 -1.2,-4.035 -1.145,-3.98 ; P4.5 -0.7,-3.98 ; 0.8,-4.005 0.825,-3.98 ; 1.225,-3.98 1.3,-4.055 ; P3.5 5.65,20.55 5.9,20.8 ; P3.6 6.15,20.45 6.3,20.6
  Top Layer w0.5: v1(3.4,-2.925) 3.419,-2.906 3.669,-2.906 3.725,-2.85 ; 3.725,-3.225 3.725,-2.85 ; C26.1 4.8,-1.3 4.8,-1.775 3.725,-2.85
  Top Layer w0.6: U1.3 -6.1,14.7 C21.1 ; J1.A4 J1.B9 -5.649,6.725 -6,6.374 -6,2.925 -5.56,2.485 ; -1.75,3.1 -1.75,3.075 -1.775,3.05 -2.375,3.05 -2.94,2.485 -3.43,2.485 J1.A9 J1.B4 -4.8,2.485 -5.56,2.485 ; -5.56,2.485 -6.25,1.794 -6.25,-0.175 -5.775,-0.65 -4.475,-0.65 -1.145,-3.98 -0.7,-3.98 0.825,-3.98 1.225,-3.98 3.45,-3.98 ; 3.4,-3.93 3.555,-3.775 v1@4.25,-3.775 ; 3.4,-3.93 v1(3.4,-2.925) v1@4.25,-3.775 ; 3.4,-3.93 3.45,-3.98 ; 3.45,-3.98 4.07,-3.98 v1(4.275,-3.775) v1@4.25,-3.775
  Top Layer w0.8: v1(3.5,21.606) 4.306,21.606 5.2,22.5 5.961,22.5 6.43,22.031 6.43,21.585 ; 6.2,20.8 6.431,21.031 6.431,21.584
  Top Layer w0.9: -2.375,3.1 -1.75,3.1 v1(0.7,3.1)
  Top Layer w1: v1(0.7,3.1) 1.25,3.1 v1(1.6,2.75)
  Bottom Layer w0.6: U1.3 -6.12,19.424 -5.769,19.775 1.35,19.775 3.181,21.606 v1(3.5,21.606) ; U1.3@-6.05,13.775 -6.05,7.325 -5.45,6.725 J1.B9 J1.A4 ; v1@3.5,21.6 3.506,21.606 v1(4.287,21.606)
  Bottom Layer w0.9: v1(1.6,2.75) 1.634,2.75 3.1,1.284 3.1,-1.284 3.025,-1.359 3.025,-2.55
  Bottom Layer w1: v1@0.725,3.1 1.25,3.1 v1(1.6,2.75) ; 3.025,-2.55 v1(3.4,-2.925) v1@4.255,-3.78
P24.0V: C10.1 P5.3 U1.1 | length 11.8
  Top Layer w0.3: -16.1,19 P5.3
  Top Layer w0.5: -16.1,19 -15.137,18.037 -14.137,18.037 v1(-13.6,17.5)
  Bottom Layer w0.8: C10.1 -15,19.7 -14.575,19.275 -14.575,18.375 -11.2,15 U1.1
  other v1: -14.121,18.053
PWM2_T: P3.3 R5.2 | length 11
  Top Layer w0.13: v1@0.925,15.1 v1(0.95,15.125) R5.2 ; v1(2.4,18.8) 2.4,20.3 3.121,21.021 4.439,21.021 4.65,20.811 P3.3 P3.3@4.65,19.375
  Bottom Layer w0.13: v1(0.95,15.125) 0.95,17.35 v1(2.4,18.8)
PWM_T: P4.3 R18.2 | length 22.4
  Top Layer w0.13: R18.2 0.175,10.225 v1(0.175,10.3) ; v1(-0.3,-6.6) 0.3,-6 P4.3
  Bottom Layer w0.13: v1(-0.3,-6.6) 0.25,-6.05 0.25,-5.3 -3.025,-2.025 -3.025,1 -2.825,1.2 -2.825,2.05 0.175,5.05 v1(0.175,10.3)
QSPI_CSN: R2.1 R3.1 U2.56 U4.1 | length 17.9
  Top Layer w0.13: R3.1@9.75,1.15 11,1.15 R2.1 12.19,1.2 12.225,1.165 ; U2.56 12.885,7.465 14.75,5.6 14.75,0.15 14.375,-0.225 13,-0.225 12.225,0.55 12.225,1.165 ; U4.1 12.225,1.165
QSPI_SCK: U2.52 U4.6 | length 6.8
  Top Layer w0.13: U2.52 8.235,7.43 8.235,6.894 9.054,6.075 12.15,6.075 13.165,5.06 13.165,4.63 U4.6
QSPI_SD0: U2.53 U4.5 | length 6.9
  Top Layer w0.13: U2.53 8.635,7.43 8.635,6.99 9.3,6.325 12.275,6.325 13.3,5.3 13.5,5.3 13.665,5.135 13.665,4.63 U4.5
QSPI_SD1: U2.55 U4.2 | length 15
  Top Layer w0.13: U2.55 9.435,7.43 9.435,6.976 9.561,6.85 10.1,6.85 10.45,7.2 12.79,7.2 14.5,5.49 14.5,0.3 14.225,0.025 13.175,0.025 12.725,0.475 U4.2
QSPI_SD2: U2.54 U4.3 | length 13.8
  Top Layer w0.13: U2.54 9.035,7.43 9.035,6.944 9.404,6.575 12.85,6.575 14.225,5.2 14.225,0.4 14.1,0.275 13.325,0.275 13.15,0.45 13.15,1.025 13.25,1.125 13.25,1.755 U4.3
QSPI_SD3: U2.51 U4.7 | length 6.7
  Top Layer w0.13: U2.51 7.835,7.43 7.835,6.94 8.95,5.825 11.95,5.825 12.665,5.11 12.665,4.63 U4.7
RESET_N: PL1.1 R1.2 U2.26 | length 8.5
  Top Layer w0.13: PL1.1 0.075,17.75 1.825,16 R1.2 4.521,16 5.4,15.121 U2.26
RPUSB_N: R6.2 U2.46 | length 8.8
  Top Layer w0.2: v1@5.6,6.5 5.8,6.7 U2.46
  Top Layer w0.3: R6.2 0.825,4.725 v1@1.4,4.725
  Bottom Layer w0.3: v1(1.395,4.581) 1.476,4.581 1.815,4.921 1.92,4.921 3.207,6.208 4.374,7.375 5.7,7.375 5.8,7.275 5.8,6.6 v1(5.6,6.4)
RPUSB_P: R7.2 U2.47 | length 9.4
  Top Layer w0.2: U2.47 6.2,6.7 v1@6.4,6.5
  Top Layer w0.3: R7.2 0.825,5.175 v1@1.4,5.175
  Bottom Layer w0.3: v1(1.395,5.313) 1.452,5.371 1.734,5.371 2.757,6.394 4.188,7.825 5.886,7.825 6.25,7.461 6.25,6.55 v1(6.4,6.4)
SW_3.3V: L1.1 U7.B2 | length 1.5
  Top Layer w0.2: U7.B2 7.42,-0.7 7.47,-0.65 7.89,-0.65 8.3,-0.24 L1.1@8.3,-0.235
SWC: P1.2 U2.24 | length 14.2
  Top Layer w0.13: P1.2 -2.9,19.4 -2.35,18.85 -0.15,18.85 1.725,16.975 4.325,16.975 6.2,15.1 U2.24
SWD: P1.4 U2.25 | length 17.4
  Top Layer w0.13: P1.4 -5.38,19.4 -3.3,19.4 -2.375,18.475 -0.129,18.475 1.696,16.65 4.225,16.65 5.8,15.075 U2.25
UART1_CTS: P2.6 U2.8 | length 4.2
  Top Layer w0.13: U2.8 v1@12.3,11.1
  Bottom Layer w0.13: v1(12.275,11.075) 12.275,11.02 14,9.295 P2.6
UART1_RTS: P2.2 U2.9 | length 10.3
  Top Layer w0.13: U2.9 11.65,11.5 11.775,11.625 12.425,11.625 12.7,11.9 12.7,18.1 P2.2
UART1_RX: P2.4 P5.5 U2.7 | length 46.3
  Top Layer w0.13: v1(-15.7,21.7) -15.1,21.1 P5.5 ; U2.7 11.45,10.7 11.6,10.55 12.85,10.55 13.065,10.765 13.065,13.385 P2.4
  Bottom Layer w0.13: v1(-15.7,21.7) -14.2,23.2 12.1,23.2 12.5,22.8 12.5,21.4 13.05,20.85 13.05,15.27 P2.4
UART1_TX: P2.5 P5.6 U2.6 | length 44.9
  Top Layer w0.13: P5.6 -14.6,21.373 -14.4,21.573 v1(-14.4,21.7) ; U2.6 13.5,10.3 14,10.8 P2.5
  Bottom Layer w0.13: v1(-14.4,21.7) -13.165,22.935 11.965,22.935 12.2,22.7 12.2,21.3 12.685,20.815 12.685,15.89 12.8,15.775 12.8,14.198 14,12.998 P2.5
USB_N: J1.A7 J1.B7 R6.1 | length 3.9
  Top Layer w0.3: J1.B7 J1.A7 -3.315,4.3 R6.1
USB_P: J1.A6 J1.B6 R7.1 | length 4.1
  Top Layer w0.3: J1.A6 -2,5.025 -1.675,5.35 -1.45,5.35 R7.1
  Bottom Layer w0.3: J1.B6 J1.A6
pads on no net: J1.A8 J1.B8 P2.3 P3.0 P4.0 P5.0 P6.0 P7.0 U2.4 U2.5 U2.11 U2.12 U2.13 U2.14 U2.16 U2.17 U2.18 U2.29 U2.30 U2.31 U2.35 U2.36 U2.38 U2.39 U2.40 U2.41 U4.9

## Polygon pours and split planes (outlines as drawn)
GND on Bottom Layer "GND_L02_P015" (solid, remove dead copper, pour order 15): -9.425,33 -19.1,23.325 -19.1,-9.225 37.625,-9.225 42.275,-4.575 42.2,-4.5 42.2,33.025
P3.3V on Bottom Layer "P3.3V_L02_P010" (solid, remove dead copper, pour order 10): 8.05,1.125 5.6,1.125 4.5,2.225 4.5,4.725 2,7.225 2,8.475 2.05,8.475 2.7,9.125 4.85,9.125 5.175,8.8 6.35,8.8 6.95,8.2 7.55,8.2 8.425,9.075 9.875,9.075 10.35,8.6 10.375,8.6 10.375,5.925 9.075,4.625 7,4.625 6.475,4.1 6.475,2.7 6.55,2.625 7.325,2.625 8.2,1.75 8.2,1.275
GND on Top Layer "GND_L01_P016" (solid, remove dead copper, pour order 16): -18.9,32.97 -18.9,-9.3 42.15,-9.3 42.15,32.975 42.125,33

## Keep-outs
Keep-Out Layer:
  the board outline again, w0.2

## Other copper
Top Layer:
  rectangle net P3.3V: 4.623,1.45 7.525,2.475

## Silkscreen, mask and mechanical layers (free items; w line width, h text height)
Top Overlay:
  text "INPUT" at -12.986,23.2 h1.5 r270
  text "D" at -8.45,20.55 h1.5 r270
  text "G" at -5.886,20.549 h1.5 r270
  text "C" at -3.536,20.549 h1.5 r270
  text "+" at -0.809,19.299 h1.5 r270
  text "LED 2" at 2.1,19.2 h1.5 r90
  text "+ -" at -17,18.4 h0.8
  text "RESET" at 0.439,17.375 h1.5 r270
  text "SW 1" at -7.799,-4.386 h1.5
  text "LED 1" at -1.6,-4.4 h1.5
  text "BOOT" at 4.086,-6.8 h1.5 r90
Bottom Overlay:
  text "SW 2" at 6.486,22.199 h1.5 r90
  text "G" at 12.999,21.489 h1.5
  text "bunnie" at 13.499,2.218 h2
  text "11/23" at 13.499,0.72 h1.5
  text "LED Controller v2" at 4.7,-5.825 h2
  text "CERN OHL-S" at 2.499,-7.782 h2
Mechanical 15:
  lines w0.381: -9.936,63.348 0.476,63.348 34.248,63.348 49.484,63.348 65.99,63.348 80.465,63.348 ; -9.936,66.396 0.476,66.396 34.248,66.396 49.484,66.396 65.99,66.396 80.465,66.396 ; -9.936,69.444 0.476,69.444 34.248,69.444 49.484,69.444 65.99,69.444 80.465,69.444 ; -9.936,72.492 0.476,72.492 34.248,72.492 49.484,72.492 65.99,72.492 80.465,72.492 ; -9.936,75.54 0.476,75.54 34.248,75.54 49.484,75.54 65.99,75.54 80.465,75.54 ; -9.936,78.588 0.476,78.588 34.248,78.588 49.484,78.588 65.99,78.588 80.465,78.588 ; -9.936,81.636 0.476,81.636 34.248,81.636 49.484,81.636 65.99,81.636 80.465,81.636 ; -9.936,84.684 0.476,84.684 34.248,84.684 49.484,84.684 65.99,84.684 80.465,84.684 ; -9.936,87.732 80.465,87.732 ; 0.476,90.78 0.476,60.3 ; 34.248,90.78 34.248,60.3 ; 49.484,90.78 49.484,60.3 ; 65.99,90.78 65.99,60.3 ; 0.476,60.3 -9.936,60.3 -9.936,90.78 80.465,90.78 80.465,60.3 65.99,60.3 ; 0.476,60.3 34.248,60.3 ; 34.248,60.3 49.484,60.3 ; 49.484,60.3 65.99,60.3
  text "Layer" at -8.158,88.494 h1.52
  text "Name" at 2.254,88.494 h1.52
  text "Material" at 36.026,88.494 h1.52
  text "Thickness" at 51.262,88.494 h1.52
  text "Constant" at 67.768,88.494 h1.52
  text "Top Overlay" at 2.254,85.446 h1.52
  text "Top Solder" at 2.254,82.398 h1.52
  text "SM-001" at 36.026,82.398 h1.52
  text "0.025mm" at 51.262,82.398 h1.52
  text "4" at 67.768,82.398 h1.52
  text "Top Surface Finish" at 2.254,79.35 h1.52
  text "PbSn" at 36.026,79.35 h1.52
  text "0.020mm" at 51.262,79.35 h1.52
  text "1" at -8.158,76.302 h1.52
  text "Top Layer" at 2.254,76.302 h1.52
  text "CF-004" at 36.026,76.302 h1.52
  text "0.035mm" at 51.262,76.302 h1.52
  text "Dielectric 1" at 2.254,73.254 h1.52
  text "Core-043" at 36.026,73.254 h1.52
  text "1.499mm" at 51.262,73.254 h1.52
  text "4.3" at 67.768,73.254 h1.52
  text "2" at -8.158,70.206 h1.52
  text "Bottom Layer" at 2.254,70.206 h1.52
  text "CF-004" at 36.026,70.206 h1.52
  text "0.035mm" at 51.262,70.206 h1.52
  text "Bottom Surface Finish" at 2.254,67.158 h1.52
  text "PbSn" at 36.026,67.158 h1.52
  text "0.020mm" at 51.262,67.158 h1.52
  text "Bottom Solder" at 2.254,64.11 h1.52
  text "SM-001" at 36.026,64.11 h1.52
  text "0.025mm" at 51.262,64.11 h1.52
  text "4" at 67.768,64.11 h1.52
  text "Bottom Overlay" at 2.254,61.062 h1.52
  text "Total board thickness:" at -8.158,58.014 h1.52
  text "1.659mm" at 51.262,58.014 h1.52
  text "Soldermask: Green / Silkscreen: White" at -8.2,55.55 h1.5
  text "Finish: HASL" at -7.95,53.05 h1.5